# Altium PCB TESTER-1602.PcbDoc
Units mm, origin at the board's own origin, x right, y up, seen from the top; angles counter-clockwise.
Board outline 100.13 x 36 mm, 2 copper layers (Top Layer, Bottom Layer); 37 components, 35 nets, 127 pads, 22 vias.
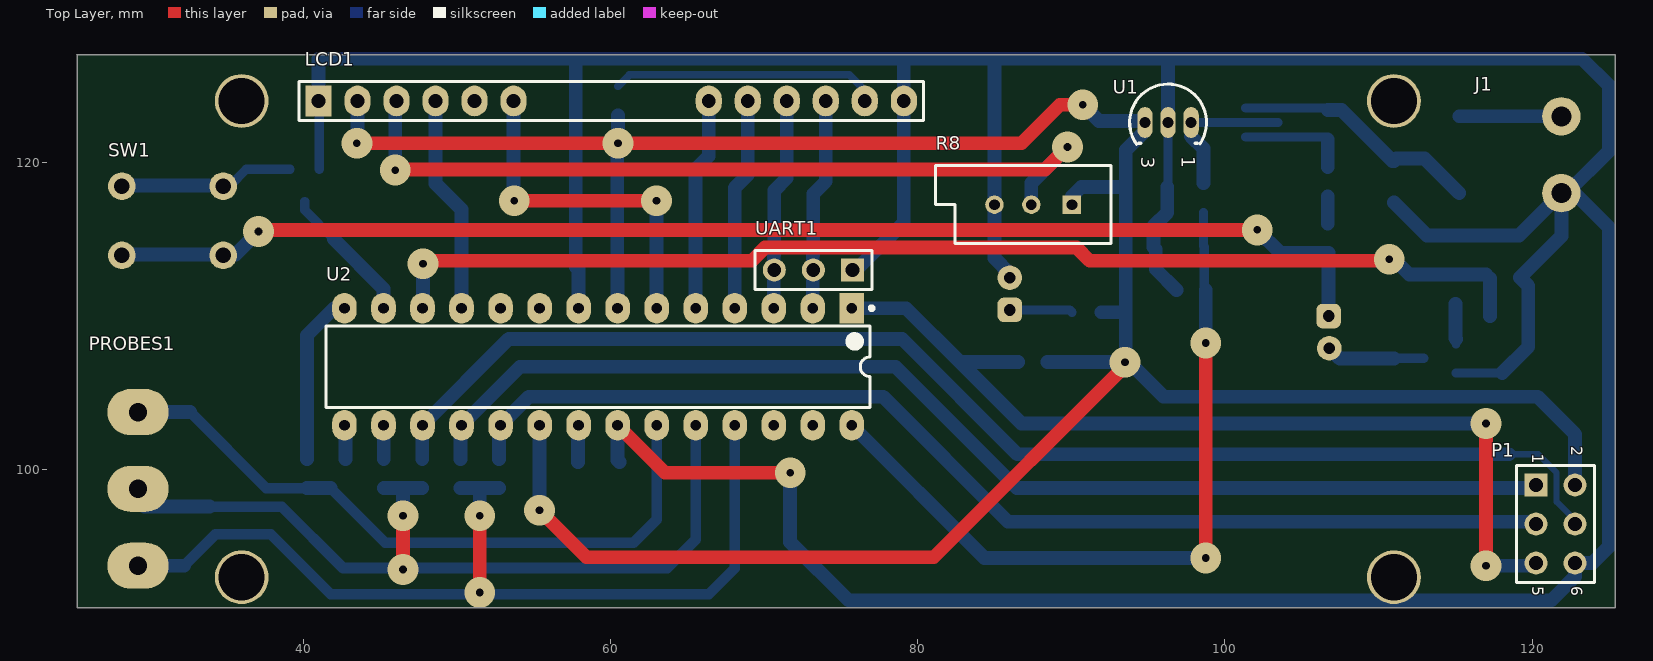
[diagram p0: Top Layer view]
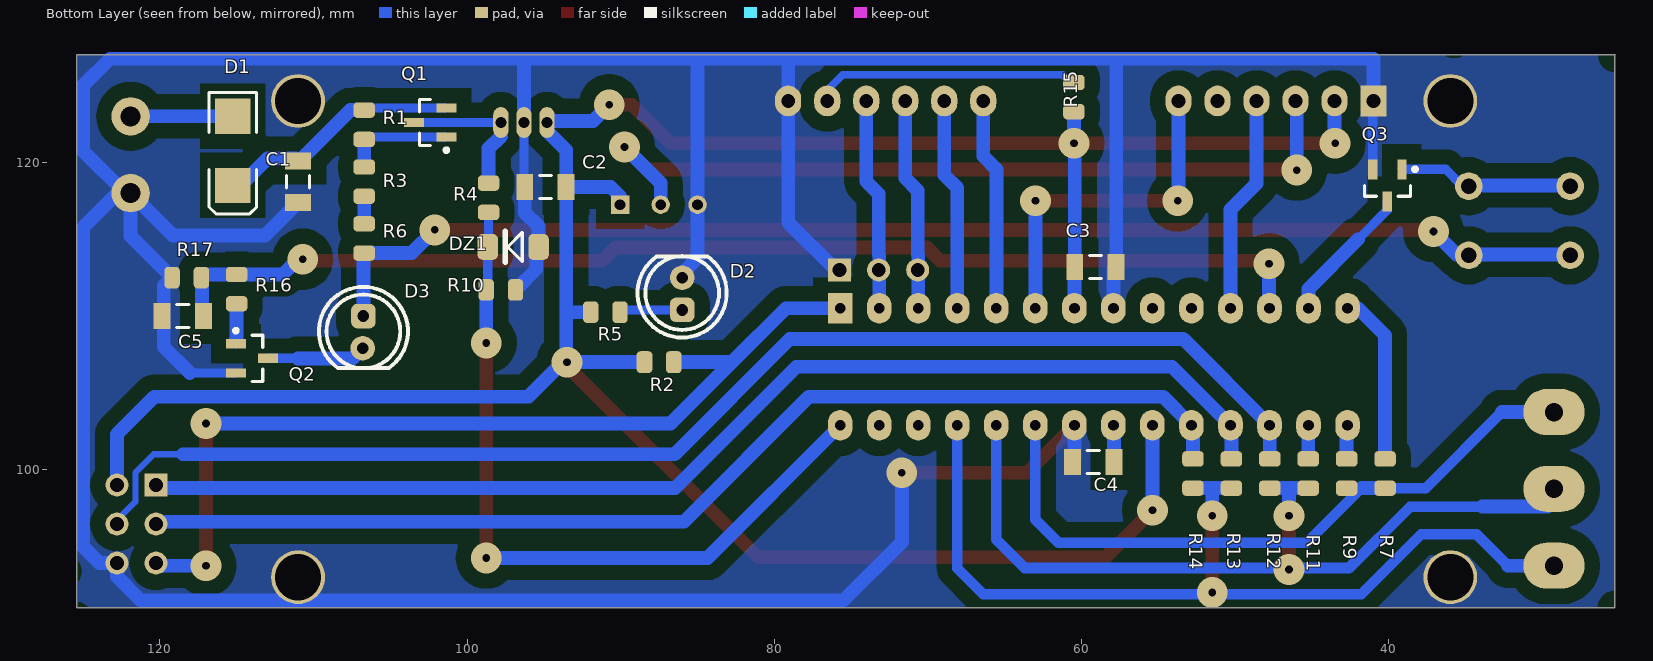
[diagram p1: Bottom Layer view, seen from below]
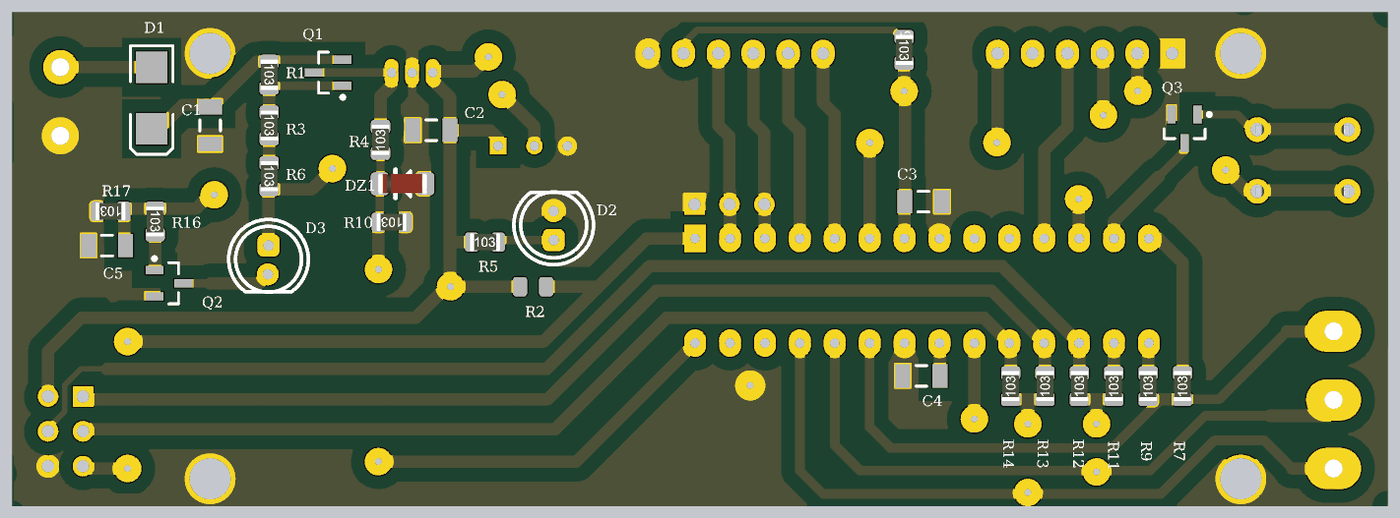
[diagram p2: 3D render of the assembled board from below, using the file's embedded part models]

## Layer stack, top to bottom
Top Layer: signal copper 0.0356
Dielectric: dielectric 0.32, FR-4, Dk 4.8
Bottom Layer: signal copper 0.0356

## Board outline
25.273,127 25.3,126.973 25.3,91 125.4,91 125.4,127

## Design rules (kind name [scope] priority, off if disabled: settings)
Clearance Clearance_Polygones [InPolygon] p1: gap=1
Clearance [All] p2: gap=0.254
HoleSize [All] p1: absolutevalues=TRUE maxlimit=4 minlimit=0.025 maxpercent=80.000 minpercent=20.000
PolygonConnect [All] p1: connectstyle=Direct reliefconductorwidth=0.254 reliefentries=4 polygonreliefangle="90 Angle" airgapwidth=0.254
RoutingVias [All] p1: holewidth=0.6 width=2 viastyle="Through Hole" minholewidth=0.5 minwidth=1.27 maxholewidth=0.8 maxwidth=3
SilkToSilkClearance SilkToSilkClearance_TXT [IsText] p1: silktosilkclearance=-5
SilkToSilkClearance [All] p2: silktosilkclearance=0.254
SilkscreenOverComponentPads SilkscreenOverComponentPads_TXT [IsText] p1: minsilkscreentomaskgap=-5
SilkscreenOverComponentPads [All] p2: minsilkscreentomaskgap=0.254
SolderMaskExpansion [All] p1: expansion=0.102
Width [All] p1: maxlimit=0.9 minlimit=0.4 preferedwidth=0.6 checkconnectedcopper=TRUE
25 further rules are at their usual default settings.

## Components (designator, comment, footprint, x,y, rotation, side; value= is the part's Value field where it differs from the comment)
C1 "100nF" C1206 111,118.75 r90 bottom
C2 "100nF" C1206 94.9,118.4 r180 bottom
C3 "100nF" C1206 59.1,113.2 r0 bottom
C4 "100nF" C1206 59.25,100.5 r180 bottom
C5 "100nF" C1206 118.5,110 r180 bottom
D1 "D Schottky" SMB 115.25,120.75 r270 bottom
D2 "PWR LED" LED_254#1 86,111.5 r90 bottom
D3 "LED" LED_254#2 106.75,109 r270 bottom
DZ1 "BZV55C5V1" SOD80D 97,114.5 r90 bottom
J1 "POWER9V" TB2-5MM 121.9,120.5 r90 top
LCD1 "HD44780" HDR1X16 41,124 r0 top
P1 "ISP" HDR2X3 120.25,99 r270 top
PROBES1 "PROBES" TB3-5MM 29.25,98.75 r270 top
Q1 "MMBT3906" SOT23_N 102.4,122.6 r0 bottom
Q2 "PMBT3904" SOT23_N 114,107.25 r180 bottom
Q3 "PMBT3904" SOT23_N 40.1,118.5 r270 bottom
R1 "ERQF06" R0805 106.7,122.45 r180 bottom
R2 "ERQF06" RC0805DS 87.5,107 r270 bottom
R3 "ERQF06" R0805 106.7,118.75 r180 bottom
R4 "10K" R0805 98.6,117.7 r0 bottom
R5 "ERQF06" r0805 91,110.25 r90 bottom
R6 "ERQF06" R0805 106.7,115.05 r180 bottom
R7 "750" R0805 40.25,99.75 r0 bottom
R8 "RPot" VR5 87.5,117.25 r180 top
R9 "500K" R0805 42.75,99.75 r0 bottom
R10 "3K3" R0805 97.8,111.7 r270 bottom
R11 "750" R0805 45.25,99.75 r0 bottom
R12 "500K" R0805 47.75,99.75 r0 bottom
R13 "750" R0805 50.25,99.75 r0 bottom
R14 "500K" R0805 52.75,99.75 r0 bottom
R15 "150" R0805 60.5,124.25 r180 bottom
R16 "ERQF06" R0805 115,111.75 r180 bottom
R17 "ERQF06" R0805 118.25,112.5 r270 bottom
SW1 "TP1101" "SW TP1101" 31.5,116.2 r180 top
U1 "µA7805CKC" TO-92 96.3,122.6 r270 top
U2 "ATmega328P-PU" 28P3 59.2,106.7 r270 top
UART1 "Header 3" HDR1X3 75.75,113 r180 top

## Footprints (in the part's own frame and the unit in brackets; to place one, negate y for a bottom-side part, rotate by r counter-clockwise, add the part's x,y. Pads: shape width x height; smd on the part's side, far side on the other; paste and mask are expansions set on the pad)
28P3 [mm] "DIP, 28-Leads, Row Spacing 7.62mm, Pitch 2.54mm, Body 34.67x7.3mm"
  rect 2x1.6 hole 0.7: 1(-3.81,16.51)
  oval 2x1.6 hole 0.7: 2(-3.81,13.97) 3(-3.81,11.43) 4(-3.81,8.89) 5(-3.81,6.35) 6(-3.81,3.81) 7(-3.81,1.27) 8(-3.81,-1.27) 9(-3.81,-3.81) 10(-3.81,-6.35) 11(-3.81,-8.89) 12(-3.81,-11.43) 13(-3.81,-13.97) 14(-3.81,-16.51) 15(3.81,-16.51) 16(3.81,-13.97) 17(3.81,-11.43) 18(3.81,-8.89) 19(3.81,-6.35) 20(3.81,-3.81) 21(3.81,-1.27) 22(3.81,1.27) 23(3.81,3.81) 24(3.81,6.35) 25(3.81,8.89) 26(3.81,11.43) 27(3.81,13.97) 28(3.81,16.51)
  silkscreen extent -3.93,-17.7 2.65,17.94, body extent -3.6,-17.65 3.6,17.65, height 4.58
C1206 [mm] "Chip Capacitor, Body 3.2x1.6mm, IPC High Density"
  rect 1.1x1.7 smd: 1(-1.35,0) 2(1.35,0)
  silkscreen extent -0.4,-0.75 0.4,0.75, body extent -1.7,-0.9 1.7,0.9, height 1.3
HDR1X3 [mm] "Connector; Header; 3 Position"
  rect 1.5x1.5 hole 0.9: 1(0,0)
  round 1.5 hole 0.9: 2(2.54,0) 3(5.08,0)
  silkscreen extent -1.27,-1.27 6.35,1.27
HDR1X16 [mm] "Connector; Header; 16 Position"
  rect 1.7x2 hole 0.9: 1(0,0)
  oval 1.7x2 hole 0.9: 2(2.54,0) 3(5.08,0) 4(7.62,0) 5(10.16,0) 6(12.7,0) 11(25.4,0) 12(27.94,0) 13(30.48,0) 14(33.02,0) 15(35.56,0) 16(38.1,0)
  silkscreen extent -1.27,-1.27 39.37,1.27
HDR2X3 [mm] "Connector; Header; 3x2 Position"
  rect 1.5x1.5 hole 0.9: 1(0,0)
  round 1.5 hole 0.9: 2(0,2.54) 3(2.54,0) 4(2.54,2.54) 5(5.08,0) 6(5.08,2.54)
  silkscreen extent -1.27,-1.27 6.35,3.81
LED_254#1 [mm]
  rrect50% 1.6x1.6 hole 0.762: 1(-1.1,0)
  round 1.6 hole 0.762: 2(1,0)
  silkscreen extent -2.9,-2.9 2.4,2.9
LED_254#2 [mm]
  rrect50% 1.6x1.6 hole 0.762: 1(-1,0)
  round 1.6 hole 0.762: 2(1.1,-0.05)
  silkscreen extent -2.9,-2.9 2.4,2.9
R0805 [mm]
  rrect50% 1.4x1 smd: 1(0,-0.953) 2(0,0.953)
  body extent -0.65,-1.1 0.65,1.1, height 0.6
r0805 [mm]
  rrect50% 1.4x1 smd: 1(0,-0.953) 2(0,0.953)
  body extent -0.65,-1.1 0.65,1.1, height 0.6
RC0805DS [mm]
  rrect50% 1.42x1.034 smd: 1(0,-0.953) 2(0,0.953)
  body extent -0.6,-1 0.6,1, height 0.5
SMB [mm] "DO-214-AA/SMB; 2 C-Bend Leads; Body 5.3 x 3.6 mm, inc. leads (LxW)"
  rect 2.3x2.3 smd: 1(-2.25,0) 2(2.25,0)
  silkscreen extent -3.8,-1.55 4.1,1.55
SOD80D [mm]
  rrect50% 1.68x1.34 smd: 1(0,-1.651) 2(0,1.651)
  silkscreen extent -1.02,-0.59 1.02,0.51, body extent -0.8,-1.75 0.8,1.75, height 1.6
SOT23_N [mm] "SOT23, 3-Leads, Body 2.9x1.3mm, Pitch 0.95mm, Lead Span 2.3mm, IPC Medium Density"
  rect 1.3x0.6 smd: 1(-1.05,0.95) 2(-1.05,-0.95) 3(1.05,0)
  silkscreen extent -1.17,-1.5 0.7,1.92, body extent -0.7,-1.5 0.7,1.5, height 1.1
"SW TP1101" [mm]
  round 1.8 hole 1: 1(-3.3,2.25) 2(-3.3,-2.25) 3(3.3,2.25) 4(3.3,-2.25)
  body extent -3.4,-3 3.4,3, height 4.3
TB2-5MM [mm]
  round 2.5 hole 1.3: 1(-2.5,0) 2(2.5,0)
  body extent -4.99,-3.3 4.99,4.2, height 10
TB3-5MM [mm]
  oval 3x4 hole 1.2: 1(-5,0) 2(0,0) 3(5,0)
  body extent -7.49,-3.3 7.49,4.2, height 10
TO-92 [mm] "TO, Flat Index; 3 In-Line, Axial Leads; Body Dia. 4.6mm; Leads 0.41 x 0.39 mm (max)"
  oval 2x1 hole 0.7: 1(0,1.5) 2(0,0) 3(0,-1.5)
  silkscreen extent -2.5,-2.5 1.44,2.5
VR5 [mm] "Thru-Hole; 3 Leads"
  rect 1.2x1.2 hole 0.7: 1(-2.54,0)
  round 1.2 hole 0.7: 2(2.5,0) 3(0.1,0)
  silkscreen extent -5.08,-2.54 6.35,2.54

## Part data
C1 C2 C3 C4 C5: library part "CAP 0805 NP0", "SMD Конденсатор 0805 NP0 25V"
D1: "Schottky Diode"
D2: library part LED
DZ1: library part "DZ BZV55C5V1", "SMD SILICON ZENER DIODE 0.5 WATT ± 5% TOLERANCE"
J1: library part CON2
LCD1: library part MHDR1X16, "Header, 16-Pin"
P1: library part "Header 3X2H", "Header, 3-Pin, Dual row, Right Angle"
PROBES1: library part "CON TBN050-D10-03", "Клемник на плату прямой шаг5мм"
Q1: "PNP Switching Transistor"
Q2 Q3: "NPN Switching Transistor"
R1 R2 R3 R5 R6 R16 R17: "Flat Chip Fuse Resistor, 0.47 Ohm to 10 Ohm Range, 5% Tolerance, 0805 Size, 0.1 W"
R4 R7 R9 R10 R11 R12 R13 R14 R15: library part "RES 0805", "SMD Резистор 0805"
R8: "Potentiometer"
SW1: library part "SW TP1101", "Кнопка"
U1: "Positive-Voltage Regulator"
U2: "8-bit AVR Microcontroller, 32KB Flash, 1KB EEPROM, 2KB SRAM, 28-pin PDIP, Industrial Grade (-40°C to 85°C)"
UART1: "Header, 3-Pin"

## Free pads (board coordinates)
  round 3.5 hole 3: 0(36,93) 0(36,124) 0(111,93) 0(111,124)

## Via types
v1: diameter 2, hole 0.5, Top Layer to Bottom Layer, 22 vias

## Nets (pads, with @x,y where several pads share a name; then routed paths per layer and width w, separated by ;. In a path a pad name is that pad's centre, name@x,y a point inside that pad or via, vN(x,y) a via of type N, cw(c..) or ccw(c..) an arc to the next point about the centre after c; other vN are vias at no path point)
BATTERY_PIN: DZ1.2 R4.2 R10.1 U2.28 | length 49.2
  Top Layer w0.9: v1(98.75,94.25) v1(98.75,108.25)
  Bottom Layer w0.6: R4.2 98.6,114.551 DZ1.2 98.651,111.802 R10.1
  Bottom Layer w0.9: U2.28 84.35,94.25 v1(98.75,94.25) ; v1(98.75,108.25) 98.752,108.752 R10.1
BLUE_PROBES: PROBES1.2 R11.2 R12.2 U2.24 | length 55.2
  Top Layer w0.9: v1(46.5,93.5) 46.5,93.75 v1@46.5,97.25
  Bottom Layer w0.7: 33.907,97.593 38.607,97.593 42.596,93.604 63.704,93.604 65.55,95.45 U2.24
  Bottom Layer w0.9: PROBES1.2@28.5,98.75 29.657,97.593 33.907,97.593 ; R11.2 46.5,98.798 ; v1@46.5,97.25 46.5,98.798 ; R12.2 46.5,98.798
  other v1: 46.5,97
D4: LCD1.11 U2.5 | length 13.8
  Bottom Layer w0.9: U2.5 65.55,119.55 66.4,120.4 LCD1.11
D5: LCD1.12 U2.4 | length 13.8
  Bottom Layer w0.9: U2.4 68.09,118.34 68.94,119.19 LCD1.12
D6: LCD1.13 U2.3 UART1.3 | length 13.8
  Bottom Layer w0.9: U2.3 70.63,113.96 70.67,114 70.67,118.17 71.48,118.98 LCD1.13
D7: LCD1.14 U2.2 UART1.2 | length 13.8
  Bottom Layer w0.9: U2.2 73.17,113.96 73.21,114 73.21,117.96 74.02,118.77 LCD1.14
E: LCD1.6 U2.6 | length 22.8
  Top Layer w0.9: v1(53.75,117.5) v1(63,117.5)
  Bottom Layer w0.9: LCD1.6 53.7,117.55 v1(53.75,117.5) ; v1(63,117.5) 63,110.52 U2.6
GND: C1.1 C2.1 C3.1 C4.1 C5.1 D2.2 DZ1.1 J1.1 LCD1.1 LCD1.16 P1.6 pad.0 Q2.2 Q3.2 R8.2 R10.2 R17.1 U1.2 U2.8 U2.22 UART1.1 | length 294.3
  Top Layer w0.9: U2.22 63.56,99.8 v1(71.7,99.8)
  Bottom Layer w0.6: LCD1.1 41.05,123.95 Q3.2 ; C2.1 96.3,118.45 U1.2 ; 96.25,126.75 96.3,126.7 ; Q2.2 118.05,106.3 ; J1.1 122.25,118 J1.1@122.75,118
  Bottom Layer w0.9: LCD1.1 41,126.75 57.75,126.75 ; U2.8 57.93,113.02 C3.1 57.75,126.75 ; U2.22 60.47,100.63 C4.1 ; v1(71.7,99.8) 71.7,95.3 75.5,91.5 113.4,91.5 ; UART1.1 76,113 79.1,116.1 LCD1.16 ; 79.1,122.65 LCD1.16 ; D2.2@85.99,112.78 85,113.77 85,126.75 ; C2.1 96.25,116.75 95.349,115.849 DZ1.1 95.5,114.349 95.5,113.048 R10.2 ; U1.2 96.3,126.7 ; C1.1 113.15,115.25 119.15,115.25 J1.1 121.9,115.198 R17.1 119.75,111.953 119.75,108 118.05,106.3 ; 113.454,91.5 121.25,91.5 122.79,93.04 P1.6 123.92,93.92 125,95 125,115.75 J1.1@122.75,118 ; J1.1@122.25,118 125,120.75 125,125 123.25,126.75 96.25,126.75 85,126.75 ; 57.75,126.75 79.25,126.75 ; LCD1.16 79.1,126.6 79.25,126.75 ; 79.25,126.75 85,126.75
GREEN_PROBES: PROBES1.3 R13.2 R14.2 U2.25 | length 61.4
  Top Layer w0.9: v1(51.5,92) v1(51.5,97)
  Bottom Layer w0.7: 32.25,93.75 34.3,95.8 37.9,95.8 41.804,91.896 66.396,91.896 68.09,93.59 U2.25
  Bottom Layer w0.9: PROBES1.3@28.5,93.75 32.25,93.75 ; R13.2 51.5,98.798 ; v1(51.5,97) 51.5,98.798 ; R14.2 51.5,98.798
MISO: P1.1 R13.1 U2.18 | length 77
  Bottom Layer w0.9: R13.1 U2.18@50.25,102.83 ; U2.18 54.12,106.7 78.55,106.7 86.45,98.8 120.05,98.8 P1.1
MOSI: P1.4 R12.1 U2.17 | length 85.8
  Bottom Layer w0.4: 118.5,101 120.392,101 121.586,99.806 121.586,97.914 122.79,96.71 P1.4
  Bottom Layer w0.9: R12.1 U2.17@47.75,102.87 ; U2.17 53.38,108.5 79,108.5 86.5,101 118.5,101
NetC1_2: C1.2 D1.2 Q1.2 R1.2 | length 16.3
  Bottom Layer w0.6: Q1.2 106.552,123.55 R1.2
  Bottom Layer w0.9: R1.2 107.598,123.402 110.9,120.1 C1.2 111.15,120.25 113,120.25 D1.2@115.25,118
NetC4_2: C4.2 U2.21 | length 2.4
  Bottom Layer w0.9: C4.2 57.9,102.86 U2.21
NetD1_1: D1.1 J1.2 | length 6.6
  Bottom Layer w0.9: D1.1 J1.2
NetD2_1: D2.1 R5.1 | length 4.1
  Bottom Layer w0.6: D2.1 89.898,110.4 R5.1
NetD3_1: D3.1 R6.1 SW1.1 SW1.3 | length 84.2
  Top Layer w0.9: v1@36.692,115.608 v1(102.1,115.608)
  Bottom Layer w0.9: SW1.3@28.2,114 35.6,114 v1(37.1,115.5) ; v1(102.1,115.608) 103.611,114.098 R6.1 ; D3.1@106.75,110.1 R6.1@106.75,114.098
NetD3_2: D3.2 Q2.3 | length 6.4
  Bottom Layer w0.6: 111,107.23 111.02,107.25 Q2.3
  Bottom Layer w0.9: D3.2 107.47,107.23 111,107.23
NetLCD1_3: LCD1.3 R8.3 | length 53.6
  Top Layer w0.9: v1(46,119.5) 46.046,119.546 88.296,119.546 v1(89.75,121)
  Bottom Layer w0.9: v1(46,119.5) 46,123.92 LCD1.3 ; R8.3 87.4,118.65 v1(89.75,121)
NetLCD1_15: LCD1.15 R15.2 | length 17.5
  Bottom Layer w0.5: R15.2@60.5,124.953 61.248,125.7 75.55,125.7 76.56,124.69 LCD1.15
NetQ1_1: Q1.1 R1.1 R3.2 | length 7.2
  Bottom Layer w0.6: Q1.1 106.547,121.65 R1.1
  Bottom Layer w0.9: R3.2 R1.1
NetQ1_3: Q1.3 R4.1 U1.1 | length 9
  Bottom Layer w0.6: U1.1 Q1.3
  Bottom Layer w0.9: U1.1@97.8,121.7 98.6,120.9 R4.1
NetQ2_1: Q2.1 R16.1 | length 2.6
  Bottom Layer w0.6: Q2.1 115.05,108.5
  Bottom Layer w0.9: R16.1 115,108.55 115.05,108.5
NetQ3_1: Q3.1 SW1.2 SW1.4 | length 11.4
  Bottom Layer w0.6: 33.8,118.5 35.25,118.5 36.3,119.55 Q3.1
  Bottom Layer w0.9: SW1.4@28.2,118.5 33.8,118.5
NetR3_1: R3.1 R6.2 | length 1.8
  Bottom Layer w0.9: R6.2 R3.1
NetR7_1: R7.1 U2.14 | length 11.2
  Bottom Layer w0.9: R7.1 40.25,108.75 42.01,110.51 U2.14
NetR9_1: R9.1 U2.15 | length 2.2
  Bottom Layer w0.9: U2.15 42.75,102.83 R9.1
NetR11_1: R11.1 U2.16 | length 2.2
  Bottom Layer w0.9: R11.1 U2.16@45.25,102.87
ON_PIN: C5.2 R16.2 R17.2 U2.12 | length 76.5
  Top Layer w0.9: v1(47.8,113.4) 48,113.6 69.214,113.6 70.068,114.454 90.346,114.454 91.2,113.6 110.1,113.6 v1@110.6,114.1
  Bottom Layer w0.6: R17.2@117,112.703 R17.2@117.25,112.453
  Bottom Layer w0.9: U2.12 47.8,110.54 v1(47.8,113.4) ; v1@110.6,114.1 111.998,112.703 R16.2 R17.2@117,112.703 ; C5.2@117.25,110 R17.2@117.25,112.453
  other v1: 110.7,113.7
RESET_PIN: Q3.3 U2.13 | length 9.1
  Bottom Layer w0.6: Q3.3 40.1,116.9 42,115
  Bottom Layer w0.9: 42,115 45.23,111.77 U2.13
REST: P1.5 R2.2 U2.1 | length 60.8
  Top Layer w0.9: v1(117,93.75) v1(117,103)
  Bottom Layer w0.9: U2.1 79.24,110.51 82.75,107 ; R2.2 82.75,107 ; v1(117,93.75) 120.08,93.75 P1.5 ; v1(117,103) 86.75,103 82.75,107
RS: LCD1.4 U2.11 | length 14.2
  Bottom Layer w0.9: LCD1.4 48.62,118.63 50.31,116.94 U2.11
RW: LCD1.5
SCK: P1.3 R14.1 U2.19 | length 73.7
  Bottom Layer w0.9: R14.1 U2.19@52.75,102.79 ; U2.19 54.71,104.75 77.75,104.75 85.892,96.608 120.142,96.608 P1.3@120.25,96.5
VCC: C2.2 C3.2 LCD1.2 P1.2 R2.1 R5.2 R8.1 R15.1 U1.3 U2.7 U2.20 | length 179.4
  Top Layer w0.9: v1(43.5,121.25) v1(60.5,121.25) 86.75,121.25 89.25,123.75 v1(90.75,123.75) ; v1(55.39,97.36) 58.45,94.3 81.05,94.3 93.5,106.75 v1(93.5,107)
  Bottom Layer w0.9: v1(43.5,121.25) 43.54,121.29 LCD1.2 ; v1(55.39,97.36) U2.20 ; U2.7 60.47,113.18 C3.2 60.45,121.3 v1(60.5,121.25) R15.1@60.5,123.048 ; R2.1 v1(93.5,107) ; R8.1 90.04,117.79 90.65,118.4 C2.2 ; v1(90.75,123.75) 91.8,122.7 U1.3@94.7,122.7 ; R5.2 93.3,110.25 93.55,110.5 ; U1.3@94.8,122.05 93.55,120.8 C2.2 ; P1.2 122.79,102.31 120.35,104.75 96,104.75 93.55,107.2 93.55,110.5 ; 93.55,110.5 C2.2
YELLOW_PROBES: PROBES1.1 R7.2 R9.2 U2.23 | length 46
  Bottom Layer w0.7: 32.65,103.75 37.602,98.798 41.5,98.798 ; 41.802,98.798 45.35,95.25 61.5,95.25 63.01,96.76 U2.23
  Bottom Layer w0.9: PROBES1.1@28.5,103.75 32.65,103.75 ; R7.2 41.5,98.798 41.802,98.798
pads on no net: U2.9 U2.10 U2.26 U2.27

## Polygon pours and split planes (outlines as drawn)
GND on Bottom Layer "Bottom Layer-No Net" (solid, remove dead copper, pour order 2): 25.273,127 25.3,126.973 25.3,91 125.3,91 125.3,127 25.273,127

## Dimensions
125.5,90.3 to 25.5,90 on Bottom Layer
126.2,93.376 to 126.473,124.376 on Bottom Layer
25.273,127 to 25.3,91 on Bottom Layer
35.749,127.908 to 110.749,127.908 on Bottom Layer

## Text inside footprints (layer, text, board x,y; h text height)
P1: Top Overlay "6" at 122.282,92.396 h1.27 r270; Top Overlay "5" at 119.742,92.396 h1.27 r270; Top Overlay "2" at 122.282,101.54 h1.27 r270; Top Overlay "1" at 119.742,101.032 h1.27 r270
U1: Top Overlay "3" at 94.265,120.376 h1.5 r270; Top Overlay "1" at 96.9,120.4 h1.5 r270